# EAGLE board 2D_PCB (EAGLE 9.7.0)
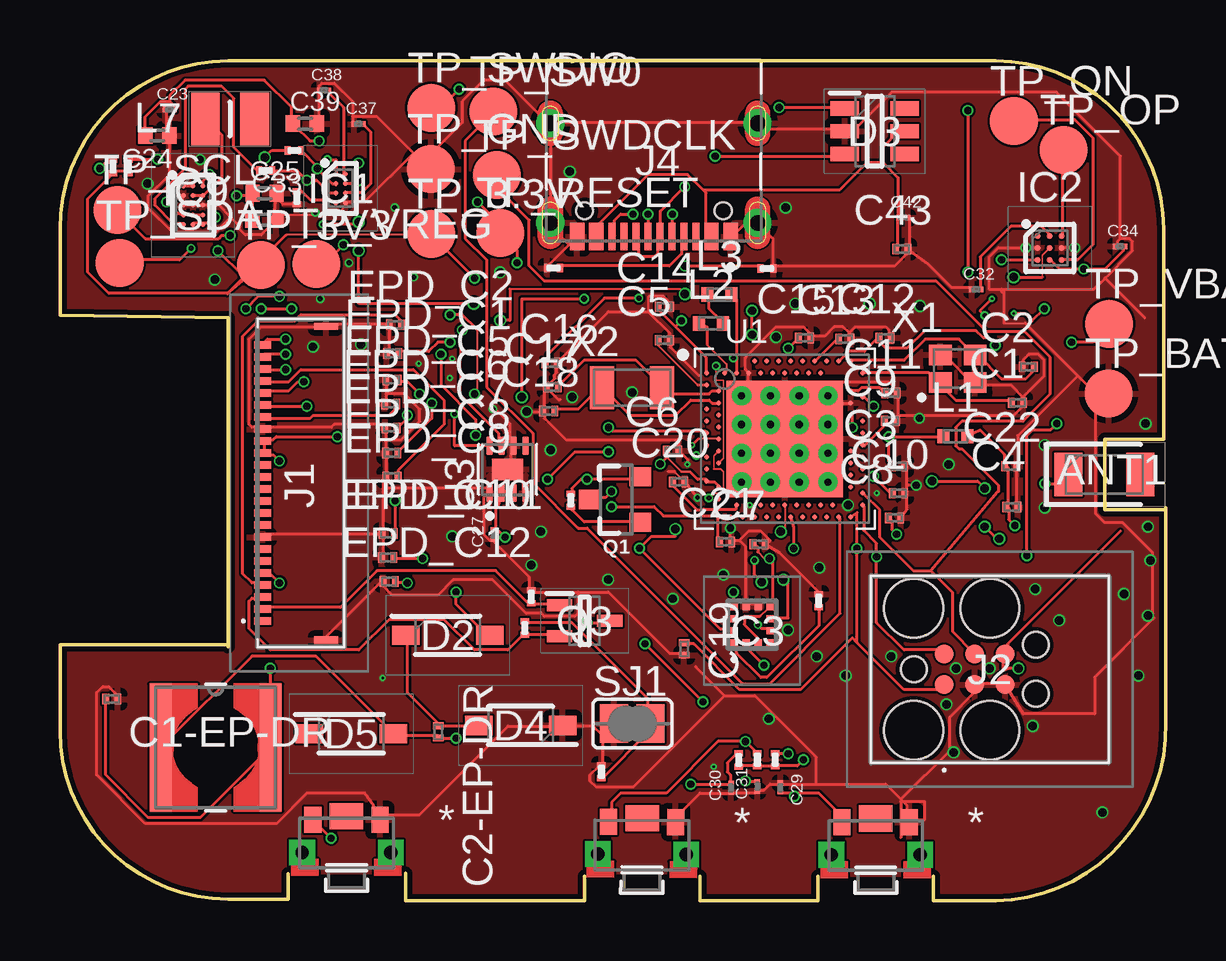
[diagram p0: board, top side]
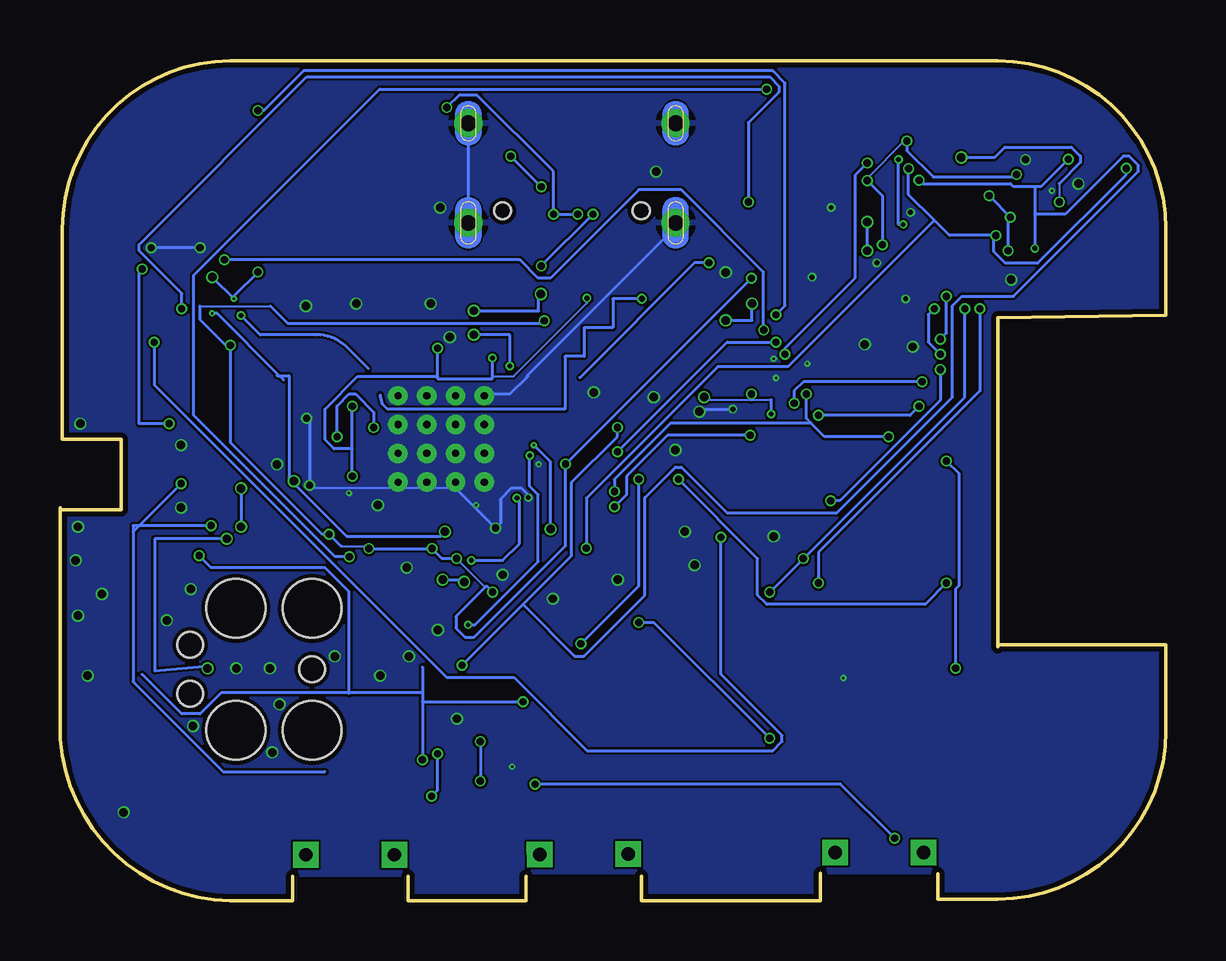
[diagram p1: board, bottom side, seen from below]

Size 46.1 x 35 mm. Coordinates in mm from the lower left corner, seen from the top.
Outline: 7,10.6 7,24.3 0,24.4 0,28 arc-90 7,35 39,35 arc-90 46,28 46,19.24 43.55,19.24 43.55,16.29 46,16.29
Outline: 46.1,16.39 46.1,7.4 arc-90 39,0 36.4,0 36.4,1.04
Outline: 9.5,1.14 9.5,0.08 7,0.08 arc-90 0,7.08 0,10.68 7,10.68
Outline: 14.4,1.15 14.4,0 21.87,0 21.87,1.04
Outline: 26.67,1.04 26.67,0 31.6,0 31.6,1.04
Copper layers (1*16): Top 0.035mm / dielectric 1.6mm / Bottom 0.035mm
Design rules "Fusion Electronics Design Rules *": minimum track width 0.07mm, minimum drill 0.1mm, track to track 0.09mm, track to pad 0.01mm, pad to pad 5mil, via to via 5mil, smd to smd 0.07mm, copper to edge 0.2mm, drill to drill 6mil, minimum pad ring 10mil, minimum via ring 3mil, stop-mask expansion 4mil, vias tented up to drill 0mil, thermal gap 10mil

## Footprints (pad centres in the part's own frame; a part is rotated, then mirrored left to right if it is on the bottom)
2450AT18B100E_ANTC3216X140N = smd 1.15 x 1.8: 1 -1.5,0; 2 1.5,0
NORDIC_NRF_3_RESC0201_L = smd 0.28 x 0.43: 1 -0.255,0; 2 0.255,0
GRM011R60J152KE01L_2_CAPC0201X13N = smd 0.22 x 0.23: 1 -0.185,0; 2 0.185,0
PERFECT_0402_0402 = smd 0.6 x 0.7: 1 -0.5,0; 2 0.5,0
ESP32_C6_LIBRARY_5_SOD3716X135N = smd 1.15 x 0.8: 1 -1.75,0; 2 1.75,0
ESP32_C6_LIBRARY_3_SOT95P280X145-6N = smd 1.2 x 0.6: 1 -1.25,0.95; 2 -1.25,0; 3 -1.25,-0.95; 4 1.25,-0.95; 5 1.25,0; 6 1.25,0.95
BQ25180YBGR_BGA8C40P2X4_100X155X50 = smd 0.2 x 0.2: A1 -0.2,0.6; A2 0.2,0.6; B1 -0.2,0.2; B2 0.2,0.2; C1 -0.2,-0.2; C2 0.2,-0.2; D1 -0.2,-0.6; D2 0.2,-0.6
DRV2605YZFR_BGA9C50P3X3_144X144X62 = smd 0.25 x 0.25: A1 -0.5,0.5; A2 0,0.5; A3 0.5,0.5; B1 -0.5,0; B2 0,0; B3 0.5,0; C1 -0.5,-0.5; C2 0,-0.5; C3 0.5,-0.5
BMA423_BMA423 = smd 0.3 x 0.35: 1 -0.75,-0.775; 2 -0.25,-0.775; 3 0.25,-0.775; 4 0.75,-0.775; 7 0.75,0.775; 8 0.25,0.775; 9 -0.25,0.775; 10 -0.75,0.775 | smd 0.35 x 0.3: 5 0.775,-0.25; 6 0.775,0.25; 11 -0.775,0.25; 12 -0.775,-0.25
RT6160AWSC_BGA15C40P3X5_140X230X60 = smd 0.216 x 0.216: A1 -0.4,0.8; A2 0,0.8; A3 0.4,0.8; B1 -0.4,0.4; B2 0,0.4; B3 0.4,0.4; C1 -0.4,0; C2 0,0; C3 0.4,0; D1 -0.4,-0.4; D2 0,-0.4; D3 0.4,-0.4; E1 -0.4,-0.8; E2 0,-0.8; E3 0.4,-0.8
503480-2400_5034802400 = smd 0.3 x 0.7: 1 -5.75,1.525; 2 -5.25,1.525; 3 -4.75,1.525; 4 -4.25,1.525; 5 -3.75,1.525; 6 -3.25,1.525; 7 -2.75,1.525; 8 -2.25,1.525; 9 -1.75,1.525; 10 -1.25,1.525; 11 -0.75,1.525; 12 -0.25,1.525; 13 0.25,1.525; 14 0.75,1.525; 15 1.25,1.525; 16 1.75,1.525; 17 2.25,1.525; 18 2.75,1.525; 19 3.25,1.525; 20 3.75,1.525; 21 4.25,1.525; 22 4.75,1.525; 23 5.25,1.525; 24 5.75,1.525 | smd 0.3 x 1: MP1 -6.54,-1.125; MP2 6.54,-1.125
TC2030-IDC_TC2030IDC = smd 0.783 x 0.783: 1 -0.953,-0.635; 2 -0.953,0.635; 3 0.317,-0.635; 4 0.317,0.635; 5 1.588,-0.635; 6 1.588,0.635 | hole 2.451: -2.223,-2.54; -2.223,2.54; 0.952,-2.54; 0.952,2.54 | hole 1.067: -2.223,0; 2.857,-1.016; 2.857,1.016
KH-TYPE-C-16P_KINGHELM_KH-TYPE-C-16P = smd 0.6 x 1.15: A1_B12 -3.2,4.725; A4_B9 -2.4,4.725; A9_B4 2.4,4.725; A12_B1 3.2,4.725 | smd 0.3 x 1.15: A5 -1.25,4.725; A6 -0.25,4.725; A7 0.25,4.725; A8 1.25,4.725; B5 1.75,4.725; B6 0.75,4.725; B7 -0.75,4.725; B8 -1.75,4.725 | drill 0.65 pad 1.05: SH1 -4.32,0; SH2 4.32,0; SH3 -4.32,4.15; SH4 4.32,4.15 | hole 0.7: -2.89,3.65; 2.89,3.65
NORDIC_NRF_2_RESC0402_L = smd 0.5 x 0.6: 1 -0.5,0; 2 0.5,0
ESP32_C6_LIBRARY_2_IND_4828-WE-TPC_WRE = smd 0.9 x 5.3: 1 -2.286,0; 2 2.286,0
MLP2016SR47MT0S1_INDC2016X100N = smd 1.2 x 2.2: 1 -1.028,0; 2 1.028,0
ESP32_C6_LIBRARY_4_ESP32_C6_LIBRARY_4_ESP32_C6_LIBRARY_4_ESP32_C6_LIBRARY_4_ESP32_WROVER_SPARKFUN-DISCRETESEMI_SOT23-3 = smd 0.8 x 0.9: 1 -0.95,-1; 2 0.95,-1; 3 0,1.1
ESP32_C6_LIBRARY_6_SOT65P210X110-3N = smd 1.05 x 0.5: 1 -1.05,0.65; 2 -1.05,-0.65; 3 1.05,0
CPF0201D7K68C1_0201 = smd 0.35 x 0.25: 1 0,0.275; 2 0,-0.275
ERA-1AEB3401C_0201 = smd 0.35 x 0.25: 1 0,0.275; 2 0,-0.275
ESP32_C6_LIBRARY_7_JUMPER_SJ = smd 1.168 x 1.6: 1 -0.762,0; 2 0.762,0
2025-10-22_07-23-44_LIBRARY_SW_EVP-AKE31A_PAN = smd 0.711 x 1.092: 1 -1.4,-0.972; 2 1.4,-0.972 | drill 0.559 pad 0.914 square: 3 -1.848,0.381; 4 1.848,0.381 | smd 1.397 x 1.092: 5 0,-1.124
HECTOR_WATCH_1_TP20R = smd 2 x 2: TP 0,0
NORDIC_NRF_4_AQFN50P700X700X85_HS-74N = smd 4.85 x 4.85: P$74 0,0 | drill 0.3 pad 0.6: P$75 -1.8,1.8; P$76 -0.6,1.8; P$77 0.6,1.8; P$78 1.8,1.8; P$79 -1.8,0.6; P$80 -0.6,0.6; P$81 0.6,0.6; P$82 1.8,0.6; P$83 -1.8,-0.6; P$84 -0.6,-0.6; P$85 0.6,-0.6; P$86 1.8,-0.6; P$87 -1.8,-1.8; P$88 -0.6,-1.8; P$89 0.6,-1.8; P$90 1.8,-1.8 | smd 0.2 x 0.2: P$A8 -1.25,3.25; P$A10 -0.75,3.25; P$A12 -0.25,3.25; P$A14 0.25,3.25; P$A16 0.75,3.25; P$A18 1.25,3.25; P$A20 1.75,3.25; P$A22 2.25,3.25; P$A23 2.75,3.25; P$AA24 3.25,-2.25; P$AB2 -2.75,-2.5; P$AC5 -2,-2.75; P$AC9 -1,-2.75; P$AC11 -0.5,-2.75; P$AC13 0,-2.75; P$AC15 0.5,-2.75; P$AC17 1,-2.75; P$AC19 1.5,-2.75; P$AC21 2,-2.75; P$AC24 3.25,-2.75; P$AD2 -2.75,-3.25; P$AD4 -2.25,-3.25; P$AD6 -1.75,-3.25; P$AD8 -1.25,-3.25; P$AD10 -0.75,-3.25; P$AD12 -0.25,-3.25; P$AD14 0.25,-3.25; P$AD16 0.75,-3.25; P$AD18 1.25,-3.25; P$AD20 1.75,-3.25; P$AD22 2.25,-3.25; P$AD23 2.75,-3.25; P$B1 -3.25,2.75; P$B3 -2.5,2.75; P$B5 -2,2.75; P$B7 -1.5,2.75; P$B9 -1,2.75; P$B11 -0.5,2.75; P$B13 0,2.75; P$B15 0.5,2.75; P$B17 1,2.75; P$B19 1.5,2.75; P$B24 3.25,2.75; P$C1 -3.25,2.25; P$D2 -2.75,2; P$D23 2.75,2; P$E24 3.25,1.75; P$F2 -2.75,1.5; P$F23 2.75,1.5; P$G1 -3.25,1.25; P$H2 -2.75,1; P$H23 2.75,1; P$J1 -3.25,0.75; P$J24 3.25,0.75; P$K2 -2.75,0.5; P$L1 -3.25,0.25; P$L24 3.25,0.25; P$M2 -2.75,0; P$N1 -3.25,-0.25; P$N24 3.25,-0.25; P$P2 -2.75,-0.5; P$P23 2.75,-0.5; P$R1 -3.25,-0.75; P$R24 3.25,-0.75; P$T2 -2.75,-1; P$T23 2.75,-1; P$U1 -3.25,-1.25; P$U24 3.25,-1.25; P$V23 2.75,-1.5; P$W1 -3.25,-1.75; P$W24 3.25,-1.75; P$Y2 -2.75,-2; P$Y23 2.75,-2
ESP32_C6_LIBRARY_SON50P200X200X80-9N = smd 0.76 x 0.27: 1 -0.985,0.75; 2 -0.985,0.25; 3 -0.985,-0.25; 4 -0.985,-0.75; 5 0.985,-0.75; 6 0.985,-0.25; 7 0.985,0.25; 8 0.985,0.75 | smd 0.9 x 1.3: 9 0,0
NORDIC_NRF_BT-XTAL_2016_N = smd 0.95 x 0.85: 1 -0.725,-0.575; 2 0.725,-0.575; 3 0.725,0.575; 4 -0.725,0.575
NORDIC_NRF_1_XTAL_3215_N = smd 1 x 1.8: 1 -1.25,0; 2 1.25,0

## Placement (x,y rotation side)
ANT1  2450AT18B100E  [2450AT18B100E_ANTC3216X140N]  43.53,17.77 0 top
C1  12pF  [NORDIC_NRF_3_RESC0201_L]  39.91,20.76 0 top
C1-EP-DR  10uF  [NORDIC_NRF_3_RESC0201_L]  2.16,8.41 0 top
C2  12pF  [NORDIC_NRF_3_RESC0201_L]  40.36,22.26 0 top
C2-EP-DR  4.7uF/25V  [NORDIC_NRF_3_RESC0201_L]  15.77,7.04 270 top
C3  1pF  [NORDIC_NRF_3_RESC0201_L]  34.95,18.11 0 top
C4  1pF  [NORDIC_NRF_3_RESC0201_L]  39.67,16.41 0 top
C5  100nF  [NORDIC_NRF_3_RESC0201_L]  25.19,23.36 0 top
C6  4.7µF  [NORDIC_NRF_3_RESC0201_L]  25.54,18.76 0 top
C7  100nF  [NORDIC_NRF_3_RESC0201_L]  29.14,14.86 0 top
C8  100nF  [NORDIC_NRF_3_RESC0201_L]  34.79,15.96 0 top
C9  820pF N.C.  [NORDIC_NRF_3_RESC0201_L]  34.62,20.01 0 top
C10  N.C.  [NORDIC_NRF_3_RESC0201_L]  34.95,16.99 0 top
C11  100pF  [NORDIC_NRF_3_RESC0201_L]  34.64,21.16 0 top
C12  100nF  [NORDIC_NRF_3_RESC0201_L]  34.39,23.46 0 top
C13  N.C.  [NORDIC_NRF_3_RESC0201_L]  32.71,23.41 0 top
C14  4.7µF  [NORDIC_NRF_3_RESC0201_L]  25.19,24.76 0 top
C15  1.0µF  [NORDIC_NRF_3_RESC0201_L]  31.04,23.46 0 top
C16  47nF  [NORDIC_NRF_3_RESC0201_L]  20.47,22.41 0 top
C17  12pF  [NORDIC_NRF_3_RESC0201_L]  20.52,21.41 0 top
C18  12pF  [NORDIC_NRF_3_RESC0201_L]  20.37,20.41 0 top
C19  100nF  [NORDIC_NRF_3_RESC0201_L]  26.02,10.5 270 top
C20  4.7µF  [NORDIC_NRF_3_RESC0201_L]  25.79,17.46 0 top
C21  4.7µF  [NORDIC_NRF_3_RESC0201_L]  27.74,14.96 0 top
C22  N.C.  [NORDIC_NRF_3_RESC0201_L]  39.63,18.11 0 top
C23  0.1uF  [GRM011R60J152KE01L_2_CAPC0201X13N]  4.57,32.97 0 top
C24  10uF  [PERFECT_0402_0402]  4.06,31.89 180 top
C25  22uF  [PERFECT_0402_0402]  8.53,29.49 0 top
C27  0.1uF  [GRM011R60J152KE01L_2_CAPC0201X13N]  18.07,15.27 90 top
C29  1uF  [GRM011R60J152KE01L_2_CAPC0201X13N]  30.03,4.73 270 top
C30  1uF  [GRM011R60J152KE01L_2_CAPC0201X13N]  27.97,4.71 90 top
C31  1uF  [GRM011R60J152KE01L_2_CAPC0201X13N]  29.07,4.77 90 top
C32  1uF  [GRM011R60J152KE01L_2_CAPC0201X13N]  38.19,25.47 0 top
C33  22uF  [PERFECT_0402_0402]  8.52,28.39 0 top
C34  0.1uF  [GRM011R60J152KE01L_2_CAPC0201X13N]  44.19,27.27 0 top
C37  1uF  [GRM011R60J152KE01L_2_CAPC0201X13N]  12.45,32.37 0 top
C38  1uF  [GRM011R60J152KE01L_2_CAPC0201X13N]  11.01,33.77 0 top
C39  10uF  [PERFECT_0402_0402]  10.21,32.39 0 top
C42  0.1uF  [GRM011R60J152KE01L_2_CAPC0201X13N]  35.15,28.47 0 top
C43  4.7uF  [NORDIC_NRF_3_RESC0201_L]  35.09,27.16 0 top
D2  MBR0530  [ESP32_C6_LIBRARY_5_SOD3716X135N]  16.16,11.07 0 top
D3  USBLC6-2SC6Y  [ESP32_C6_LIBRARY_3_SOT95P280X145-6N]  33.96,32.07 0 top
D4  MBR0530  [ESP32_C6_LIBRARY_5_SOD3716X135N]  19.2,7.31 180 top
D5  MBR0530  [ESP32_C6_LIBRARY_5_SOD3716X135N]  12.14,6.97 0 top
EPD_C1  1uF/50V  [NORDIC_NRF_3_RESC0201_L]  13.87,22.81 0 top
EPD_C2  1uF/50V  [NORDIC_NRF_3_RESC0201_L]  13.98,24.01 0 top
EPD_C5  0.1uF/50V  [NORDIC_NRF_3_RESC0201_L]  13.84,21.71 0 top
EPD_C6  1uF/50V  [NORDIC_NRF_3_RESC0201_L]  13.79,20.71 0 top
EPD_C7  1uF/50V  [NORDIC_NRF_3_RESC0201_L]  13.8,19.71 0 top
EPD_C8  1uF/50V  [NORDIC_NRF_3_RESC0201_L]  13.83,18.66 0 top
EPD_C9  1uF/50V  [NORDIC_NRF_3_RESC0201_L]  13.84,17.66 0 top
EPD_C10  1uF/50V  [NORDIC_NRF_3_RESC0201_L]  13.68,15.31 0 top
EPD_C11  1uF/50V  [NORDIC_NRF_3_RESC0201_L]  13.66,14.31 0 top
EPD_C12  1uF/50V  [NORDIC_NRF_3_RESC0201_L]  13.72,13.31 0 top
IC1  BQ25180YBGR  [BQ25180YBGR_BGA8C40P2X4_100X155X50]  11.7,29.69 0 top
IC2  DRV2605YZFR  [DRV2605YZFR_BGA9C50P3X3_144X144X62]  41.26,27.21 0 top
IC3  BMA421  [BMA423_BMA423]  28.85,11.51 0 top
IC9  RT6160AWSC  [RT6160AWSC_BGA15C40P3X5_140X230X60]  5.55,28.99 0 top
J1  503480-2400  [503480-2400_5034802400]  9.97,17.41 90 top
J2  TC2030-IDC  [TC2030-IDC_TC2030IDC]  37.81,9.65 0 top
J4  KH-TYPE-C-16P  [KH-TYPE-C-16P_KINGHELM_KH-TYPE-C-16P]  24.76,32.4 180 top
L1  3.9nH  [NORDIC_NRF_2_RESC0402_L]  37.32,19.36 0 top
L2  10µH  [NORDIC_NRF_2_RESC0402_L]  27.14,24.06 0 top
L3  15nH  [NORDIC_NRF_2_RESC0402_L]  27.49,25.26 0 top
L5  68uH  [ESP32_C6_LIBRARY_2_IND_4828-WE-TPC_WRE]  6.49,6.39 0 top
L7  FTC252012SR47MBCA  [MLP2016SR47MT0S1_INDC2016X100N]  7.09,32.58 0 top
Q1  20V/4.2A/52mΩ/1.4W  [ESP32_C6_LIBRARY_4_ESP32_C6_LIBRARY_4_ESP32_C6_LIBRARY_4_ESP32_C6_LIBRARY_4_ESP32_WROVER_SPARKFUN-DISCRETESEMI_SOT23-3]  23.19,16.73 90 top
Q3  SI1308EDL-T1-GE3  [ESP32_C6_LIBRARY_6_SOT65P210X110-3N]  21.87,11.67 0 top
R1_EP_DR  0.47  [CPF0201D7K68C1_0201]  19.37,11.37 0 top
R1_USB  5K1  [ERA-1AEB3401C_0201]  20.57,26.37 90 top
R2  0  [CPF0201D7K68C1_0201]  8.57,30.43 90 top
R2_EP_DR  10K  [CPF0201D7K68C1_0201]  19.65,12.67 0 top
R2_USB  5K1  [ERA-1AEB3401C_0201]  29.47,26.35 90 top
R3  0  [CPF0201D7K68C1_0201]  31.63,12.51 180 top
R4  0  [CPF0201D7K68C1_0201]  9.77,31.27 90 top
R5  10K  [ERA-1AEB3401C_0201]  28.29,5.87 0 top
R7  10K  [ERA-1AEB3401C_0201]  29.81,5.88 0 top
R8  10K  [ERA-1AEB3401C_0201]  29.07,5.88 0 top
R9  10K  [CPF0201D7K68C1_0201]  9.87,29.3 180 top
R17  3K3  [CPF0201D7K68C1_0201]  2.21,30.6 180 top
R18  3K3  [CPF0201D7K68C1_0201]  2.85,30.6 180 top
R_PWR_EPD  10K  [CPF0201D7K68C1_0201]  21.29,16.7 180 top
R_TYPE_SEL  2.2  [CPF0201D7K68C1_0201]  22.57,5.38 0 top
SJ1  [ESP32_C6_LIBRARY_7_JUMPER_SJ]  23.86,7.39 0 top
SW_DN  2025-10-22_07-23-44_LIBRARY_EVP-AKE31ASW_EVP-AKE31A_PAN  [2025-10-22_07-23-44_LIBRARY_SW_EVP-AKE31A_PAN]  34,2.31 180 top
SW_ENT  2025-10-22_07-23-44_LIBRARY_EVP-AKE31ASW_EVP-AKE31A_PAN  [2025-10-22_07-23-44_LIBRARY_SW_EVP-AKE31A_PAN]  24.26,2.32 179.7 top
SW_UP  2025-10-22_07-23-44_LIBRARY_EVP-AKE31ASW_EVP-AKE31A_PAN  [2025-10-22_07-23-44_LIBRARY_SW_EVP-AKE31A_PAN]  11.94,2.41 180 top
TP_3.3V  HECTOR_WATCH_1_TPTP20R  [HECTOR_WATCH_1_TP20R]  15.48,27.79 0 top
TP_3V3  HECTOR_WATCH_1_TPTP20R  [HECTOR_WATCH_1_TP20R]  8.38,26.49 0 top
TP_BAT_GND  HECTOR_WATCH_1_TPTP20R  [HECTOR_WATCH_1_TP20R]  43.71,21.14 0 top
TP_GND  HECTOR_WATCH_1_TPTP20R  [HECTOR_WATCH_1_TP20R]  15.46,30.49 0 top
TP_ON  HECTOR_WATCH_1_TPTP20R  [HECTOR_WATCH_1_TP20R]  39.76,32.49 0 top
TP_OP  HECTOR_WATCH_1_TPTP20R  [HECTOR_WATCH_1_TP20R]  41.84,31.29 0 top
TP_RESET  HECTOR_WATCH_1_TPTP20R  [HECTOR_WATCH_1_TP20R]  18.35,27.84 0 top
TP_SCL  HECTOR_WATCH_1_TPTP20R  [HECTOR_WATCH_1_TP20R]  2.4,28.79 0 top
TP_SDA  HECTOR_WATCH_1_TPTP20R  [HECTOR_WATCH_1_TP20R]  2.49,26.59 0 top
TP_SW0  HECTOR_WATCH_1_TPTP20R  [HECTOR_WATCH_1_TP20R]  18.07,32.89 0 top
TP_SWDCLK  HECTOR_WATCH_1_TPTP20R  [HECTOR_WATCH_1_TP20R]  18.21,30.24 0 top
TP_SWDIO  HECTOR_WATCH_1_TPTP20R  [HECTOR_WATCH_1_TP20R]  15.48,33.04 0 top
TP_VBAT  HECTOR_WATCH_1_TPTP20R  [HECTOR_WATCH_1_TP20R]  43.73,24.04 0 top
TP_VREG  HECTOR_WATCH_1_TPTP20R  [HECTOR_WATCH_1_TP20R]  10.69,26.54 0 top
U1  NRF52840 _QF  [NORDIC_NRF_4_AQFN50P700X700X85_HS-74N]  30.21,19.25 0 top
U3  MAX17048G+T10  [ESP32_C6_LIBRARY_SON50P200X200X80-9N]  18.66,17.98 90 top
X1  32MHz  [NORDIC_NRF_BT-XTAL_2016_N]  37.42,22.18 0 top
X2  32.768kHz  [NORDIC_NRF_1_XTAL_3215_N]  23.85,21.38 0 top

## Library data of the parts
ANT1 = InkTime_v5; ARROW_PART_NUMBER: 2450AT18B100E; ARROW_PRICE-STOCK: https://www.arrow.com/en/products/2450at18b100e/johanson-dielectrics?utm_currency=USD&region=nac; DESCRIPTION: Antennas 2.45GHz ANTENNA; HEIGHT: 1.4mm; MANUFACTURER_NAME: JOHANSON TECHNOLOGY; MANUFACTURER_PART_NUMBER: 2450AT18B100E; MOUSER_PART_NUMBER: 609-2450AT18B100E; MOUSER_PRICE-STOCK: https://www.mouser.co.uk/ProductDetail/Johanson-Technology/2450AT18B100E?qs=yCnrNFeXz%252Bh5MFsFIXGZGA%3D%3D
C1 C1-EP-DR C2 C2-EP-DR C3-C22 C24 C25 C33 C39 C43 EPD_C1 EPD_C2 EPD_C5-EPD_C12 L1-L3 R1_EP_DR R1_USB R2 R2_EP_DR R2_USB R3-R5 R7-R9 R17 R18 R_PWR_EPD R_TYPE_SEL SJ1 TP_3.3V TP_3V3 TP_BAT_GND TP_GND TP_ON TP_OP TP_RESET TP_SCL TP_SDA TP_SW0 TP_SWDCLK TP_SWDIO TP_VBAT TP_VREG X1 X2 = InkTime_v5
C23 C27 C29-C32 C34 C37 C38 C42 = InkTime_v5; AVAILABILITY: In Stock; CHECK_PRICES: https://www.snapeda.com/parts/GRM011R60J152KE01L/Murata/view-part/?ref=eda; DESCRIPTION: SMD Capacitor X5R(EIA) with Capacitance: 1500pF Tol. 10%. Rated Voltage: 6.3Vdc; MF: Murata; MP: GRM011R60J152KE01L; PACKAGE: 0201 Murata; PRICE: None; SNAPEDA_LINK: https://www.snapeda.com/parts/GRM011R60J152KE01L/Murata/view-part/?ref=snap
D2 D4 D5 = InkTime_v5; AVAILABILITY: In Stock; CHECK_PRICES: https://www.snapeda.com/parts/MBR0530/Onsemi/view-part/?ref=eda; DESCRIPTION: Diode Schottky 30 V 500mA Surface Mount SOD-123; MF: ON Semiconductor; MP: MBR0530; PACKAGE: SOD-123-2 ON Semiconductor; PRICE: None; PURCHASE-URL: https://www.snapeda.com/api/url_track_click_mouser/?unipart_id=179458&manufacturer=ON Semiconductor&part_name=MBR0530&search_term=None; SNAPEDA_LINK: https://www.snapeda.com/parts/MBR0530/Onsemi/view-part/?ref=snap
D3 = InkTime_v5; AVAILABILITY: In Stock; CHECK_PRICES: https://www.snapeda.com/parts/USBLC6-2SC6Y/STMicroelectronics/view-part/?ref=eda; DESCRIPTION: 17V Clamp 5A (8/20µs) Ipp Tvs Diode Surface Mount SOT-23-6; MF: STMicroelectronics; MP: USBLC6-2SC6Y; PACKAGE: SOT-23-6 STMicroelectronics; PRICE: None; SNAPEDA_LINK: https://www.snapeda.com/parts/USBLC6-2SC6Y/STMicroelectronics/view-part/?ref=snap
IC1 = InkTime_v5; ARROW_PART_NUMBER: BQ25180YBGR; ARROW_PRICE-STOCK: https://www.arrow.com/en/products/bq25180ybgr/texas-instruments?utm_currency=USD&region=nac; DESCRIPTION: Charger IC Lithium Ion/Polymer, Lithium Iron Phosphate 8-DSBGA (1.6x1.1); HEIGHT: 0.5mm; MANUFACTURER_NAME: Texas Instruments; MANUFACTURER_PART_NUMBER: BQ25180YBGR; MOUSER_PART_NUMBER: 595-BQ25180YBGR; MOUSER_PRICE-STOCK: https://www.mouser.co.uk/ProductDetail/Texas-Instruments/BQ25180YBGR?qs=doiCPypUmgEWjAK%252BJAX6Tw%3D%3D
IC2 = InkTime_v5; ARROW_PART_NUMBER: DRV2605YZFR; ARROW_PRICE-STOCK: https://www.arrow.com/en/products/drv2605yzfr/texas-instruments?region=nac; DESCRIPTION: Haptic Driver for ERM/LRA with Built-In Library and Smart Loop Architecture; HEIGHT: 0.625mm; MANUFACTURER_NAME: Texas Instruments; MANUFACTURER_PART_NUMBER: DRV2605YZFR
IC3 = InkTime_v5; ARROW_PART_NUMBER: BMA423; ARROW_PRICE-STOCK: https://www.arrow.com/en/products/bma423/bosch; DESCRIPTION: Accelerometers Triaxial low-g 12bit Acceleration Sensor; HEIGHT: 1mm; MANUFACTURER_NAME: BOSCH; MANUFACTURER_PART_NUMBER: BMA423; MOUSER_PART_NUMBER: 262-BMA423; MOUSER_PRICE-STOCK: https://www.mouser.co.uk/ProductDetail/Bosch-Sensortec/BMA423?qs=HXFqYaX1Q2xC%252BSgeGoX3mg%3D%3D
IC9 = InkTime_v5; DESCRIPTION: Buck-Boost Regulator Positive Output Step-Up/Step-Down I2C DC-DC Controller IC 15-WL-CSP (BSC) (1.4x2.3); HEIGHT: 0.6mm; MANUFACTURER_NAME: RICHTEK; MANUFACTURER_PART_NUMBER: RT6160AWSC; MOUSER_PART_NUMBER: 835-RT6160AWSC; MOUSER_PRICE-STOCK: https://www.mouser.co.uk/ProductDetail/Richtek/RT6160AWSC?qs=amGC7iS6iy%2FLd9PSoixZXQ%3D%3D
J1 = InkTime_v5; DESCRIPTION: FFC & FPC Connectors 0.5mm FPC RA SMT Dual Contact 24Ckt; HEIGHT: 1.87mm; MANUFACTURER_NAME: Molex; MANUFACTURER_PART_NUMBER: 503480-2400; MOUSER_PART_NUMBER: 538-503480-2400; MOUSER_PRICE-STOCK: https://www.mouser.co.uk/ProductDetail/Molex/503480-2400?qs=OAhjpuo3Vu7efIoxFh9AOw%3D%3D
J2 = InkTime_v5; DESCRIPTION: CABLE ADAPTER 6 POS; HEIGHT: 19mm; MANUFACTURER_NAME: Tag Connect; MANUFACTURER_PART_NUMBER: TC2030-IDC
J4 = InkTime_v5; AVAILABILITY: Not in stock; CHECK_PRICES: https://www.snapeda.com/parts/KH-TYPE-C-16P/Kinghelm/view-part/?ref=eda; MF: kinghelm; MP: KH-TYPE-C-16P; PACKAGE: None; PRICE: None; SNAPEDA_LINK: https://www.snapeda.com/parts/KH-TYPE-C-16P/Kinghelm/view-part/?ref=snap
L5 = InkTime_v5; COPYRIGHT: Copyright (C) 2024 Ultra Librarian. All rights reserved.; MANUFACTURER_PART_NUMBER: 744043680; MFR_NAME: Wurth Electronics
L7 = InkTime_v5; DESCRIPTION: SMD / SMT Inductors (Coils), L=0.47?H, L x W x T :; HEIGHT: 1mm; JLCPCB: https://jlcpcb.com/partdetail/6763488-FTC252012SR47MBCA/C5832368; MANUFACTURER_NAME: TDK; MANUFACTURER_PART_NUMBER: FTC252012SR47MBCA
Q1 = InkTime_v5; PROD_ID: TRAN-14388
Q3 = InkTime_v5; AVAILABILITY: In Stock; CHECK_PRICES: https://www.snapeda.com/parts/SI1308EDL-T1-GE3/Vishay+Siliconix/view-part/?ref=eda; DESCRIPTION: Si1308EDL-T1-GE3 N-channel MOSFET Transistor, 1.5 A, 30 V, 3-Pin SC-70 | Siliconix / Vishay SI1308EDL-T1-GE3; MF: Vishay Siliconix; MP: SI1308EDL-T1-GE3; PACKAGE: SOT-323 Vishay Semiconductor; PRICE: None; PURCHASE-URL: https://www.snapeda.com/api/url_track_click_mouser/?unipart_id=274603&manufacturer=Vishay Siliconix&part_name=SI1308EDL-T1-GE3&search_term=None; SNAPEDA_LINK: https://www.snapeda.com/parts/SI1308EDL-T1-GE3/Vishay+Siliconix/view-part/?ref=snap
SW_DN SW_ENT SW_UP = InkTime_v5; COPYRIGHT: Copyright (C) 2025 Ultra Librarian. All rights reserved.; DIGI-KEY_PART_NUMBER_1: P123437TR-ND; DIGI-KEY_PART_NUMBER_2: P123437CT-ND; DIGI-KEY_PART_NUMBER_3: P123437DKR-ND; MANUFACTURER_NAME: Panasonic; MANUFACTURER_PART_NUMBER: EVP-AKE31A
U1 = InkTime_v5; U1: NRF52840 _QF
U3 = InkTime_v5; AVAILABILITY: In Stock; CHECK_PRICES: https://www.snapeda.com/parts/MAX17048G+T10/Analog+Devices/view-part/?ref=eda; DESCRIPTION: 3µA 1-Cell/2-Cell Fuel Gauge with ModelGauge; MF: Analog Devices; MP: MAX17048G+T10; PACKAGE: TDFN-8 Maxim; PRICE: None; PURCHASE-URL: https://www.snapeda.com/api/url_track_click_mouser/?unipart_id=329239&manufacturer=Analog Devices&part_name=MAX17048G+T10&search_term=None; SNAPEDA_LINK: https://www.snapeda.com/parts/MAX17048G+T10/Analog+Devices/view-part/?ref=snap

## Nets
3V3/1.7D: C34.2 IC2.C2 Q1.2 R5.2 R7.2 R8.2 R_PWR_EPD.2
3V3/2.4A: C6.1 C7.1 C8.1 C12.1 C14.1 C19.1 C25.1 C33.1 IC3.3 IC3.7 IC3.10 IC9.E2 IC9.E3 J2.1 R17.1 R18.1 TP_3.3V.TP TP_3V3.TP U1.P$A22 U1.P$AD14 U1.P$AD23 U1.P$B1 U1.P$W1 U1.P$Y2
ALERT/1.6C: U3.5
ALERT/2.5C: U1.P$J24
D+/1.5D: D3.4
D+/2.7D: U1.P$AD6
D-/1.5D: D3.6
D-/2.7D: U1.P$AD4
DN: D3.1 J4.A7 J4.B7
DP: D3.3 J4.A6 J4.B6
EPD_3V3: C1-EP-DR.1 EPD_C5.2 J1.15 J1.16 L5.2 Q1.3
EPD_BUSY/1.5D: J1.9
EPD_BUSY/2.2D: U1.P$AD12
EPD_CS/1.4C: J1.12
EPD_CS/2.2D: U1.P$K2
EPD_DC/1.5D: J1.11
EPD_DC/2.2D: U1.P$AD10
EPD_RST/1.5D: J1.10
EPD_RST/2.2D: U1.P$AC11
GDR: J1.2 Q3.1 R2_EP_DR.2
GND: C1-EP-DR.2 C1.2 C2.1 C3.2 C4.2 C5.2 C6.2 C7.2 C8.2 C9.2 C10.2 C11.2 C12.2 C13.2 C14.2 C15.2 C16.2 C17.1 C18.1 C19.2 C20.2 C21.2 C22.2 C23.1 C24.1 C25.2 C27.1 C29.1 C30.1 C31.1 C32.1 C33.2 C34.1 C37.1 C38.1 C39.2 C42.2 C43.2 D3.2 D4.1 EPD_C1.1 EPD_C2.1 EPD_C5.1 EPD_C6.1 EPD_C7.1 EPD_C8.1 EPD_C9.1 EPD_C10.1 EPD_C11.1 EPD_C12.1 IC1.D2 IC2.B1 IC2.B3 IC3.8 IC3.9 IC9.B1 IC9.C1 IC9.C2 IC9.C3 J1.8 J1.17 J1.MP1 J1.MP2 J2.3 J2.5 J4.A1_B12 J4.A12_B1 J4.SH1 J4.SH2 J4.SH3 J4.SH4 R1_USB.1 R2_EP_DR.1 R2_USB.2 R3.2 R9.1 R_TYPE_SEL.1 SJ1.1 SW_DN.1 SW_ENT.1 SW_UP.1 TP_BAT_GND.TP TP_GND.TP U1.P$74 U1.P$75 U1.P$76 U1.P$77 U1.P$78 U1.P$79 U1.P$80 U1.P$81 U1.P$82 U1.P$83 U1.P$84 U1.P$85 U1.P$86 U1.P$87 U1.P$88 U1.P$89 U1.P$90 U1.P$B7 U1.P$F23 U3.1 U3.4 U3.6 U3.9 X1.2 X1.4
HAPTIC_EN/1.4C: IC2.A1
HAPTIC_EN/2.6A: U1.P$U1
IMU_INT1: IC3.5 U1.P$N1
IMU_INT2: IC3.6 U1.P$P2
LX1: IC9.B2 IC9.B3 L7.1
LX2: L7.2
MOSI/1.5B: J1.14
MOSI/2.2D: U1.P$B13
N$1: IC1.D1 R9.2
N$2: L2.1 U1.P$B3
N$3: IC3.1 R3.1
N$4: L2.2 L3.1
N$5: C10.1 C15.1 C16.1 L3.2 U1.P$B5 U1.P$E24
N$6: C13.1 U1.P$A18
N$7: C5.1 U1.P$C1
N$8: IC9.E1 R2.1
N$9: C17.2 U1.P$D2 X2.2
N$10: IC9.D2 IC9.D3
N$11: IC9.D1 R4.1
N$12: C18.2 U1.P$F2 X2.1
N$13: C20.1 U1.P$AC5
N$14: C9.1 U1.P$N24
N$15: C3.1 L1.1 U1.P$H23
N$16: ANT1.1 C4.1 C22.1 L1.2
N$17: C11.1 U1.P$D23
N$18: C1.1 U1.P$B24 X1.1
N$19: C2.2 U1.P$A23 X1.3
N$20: C2-EP-DR.1 D2.1 D4.2
N$21: C2-EP-DR.2 D5.2 L5.1 Q3.3
N$22: D5.1
N$24: R1_EP_DR.1 R_TYPE_SEL.2 SJ1.2
N$25: C32.2 IC2.A2
N$26: J4.A5 R1_USB.2
N$27: J4.B5 R2_USB.1
N$28: EPD_C2.2 J1.4
N$29: EPD_C1.2 J1.5
N$30: EPD_C6.2 J1.18
N$31: EPD_C7.2 J1.19
N$32: EPD_C8.2 J1.20
N$33: EPD_C10.2 J1.22
N$34: EPD_C12.2 J1.24
OUT+: IC2.A3 TP_OP.TP
OUT-: IC2.C3 TP_ON.TP
P0.04: U1.P$J1
P0.09: U1.P$L24
P0.13/1.5D: C30.2 R5.1 SW_UP.2
P0.13/2.6C: U1.P$AD8
P0.14/1.5D: C31.2 R8.1 SW_ENT.2
P0.14/2.7C: U1.P$AC9
P0.19: U1.P$AC15
P0.20: U1.P$AD16
P0.21: U1.P$AC17
P0.22: U1.P$AD18
P0.23: U1.P$AC19
P0.24: U1.P$AD20
P0.25: U1.P$AC21
P0.26: U1.P$G1
P0.27: U1.P$H2
P0.28: U1.P$B11
P0.29: U1.P$A10
P0.30: U1.P$B9
P0.31: U1.P$A8
P1.01/1.6C: Q1.1 R_PWR_EPD.1
P1.01/2.4B: U1.P$Y23
P1.02/1.6C: C29.2 R7.1 SW_DN.2
P1.02/2.8C: U1.P$W24
P1.03: U1.P$V23
P1.04: U1.P$U24
P1.05: U1.P$T23
P1.06: U1.P$R24
P1.07: U1.P$P23
P1.09: U1.P$R1
P1.10: U1.P$A20
P1.11: U1.P$B19
P1.12: U1.P$B17
P1.13: U1.P$A16
P1.14: U1.P$B15
P1.15: U1.P$A14
PMIC_INT: IC1.A1 U1.P$T2
PREVGH: EPD_C9.2 J1.21
PREVGL: D2.2 EPD_C11.2 J1.23
RESE: J1.3 Q3.2 R1_EP_DR.2
RESET: J2.6 TP_RESET.TP U1.P$AC13
SCK/1.5B: J1.13
SCK/2.2D: U1.P$A12
SCL/1.4C: IC2.C1 U3.7
SCL/2.4C: IC1.B1 IC3.12 R4.2 R17.2 TP_SCL.TP U1.P$M2
SDA/1.4C: IC2.B2 U3.8
SDA/2.4C: IC1.C1 IC3.2 R2.2 R18.2 TP_SDA.TP U1.P$L1
SWDCLK: J2.4 TP_SWDCLK.TP U1.P$AA24
SWDIO: J2.2 TP_SWDIO.TP U1.P$AC24
SWO: TP_SW0.TP U1.P$AD22
VBAT/1.2A: C27.2 TP_VBAT.TP U3.2 U3.3
VBAT/2.5C: C37.2 IC1.C2
VBUS/1.5D: C42.1 C43.1 D3.5 J4.A4_B9 J4.A9_B4
VBUS/2.6D: C21.1 C38.2 IC1.A2 U1.P$AD2
VREG: C23.2 C24.2 C39.1 IC1.B2 IC9.A1 IC9.A2 IC9.A3 TP_VREG.TP

## Tracks (layer width: path | path; a pad name or v marks a point on that pad's centre or on a via)
3V3/1.7D  (via drill 0.3)
  Top 0.127: R_PWR_EPD.2 21.34,17.06 21.34,17.19 21.72,17.57 v21.97,17.57 24.13,17.57 Q1.2 | R5.2 28.33,5.63 28.96,5.63 R8.2 29.09,5.63 29.72,5.63 R7.2 29.85,5.63 30.74,5.63 v30.99,5.88 | C34.2 44.33,27.22 44.33,27.09 43.56,26.33 v42.68,26.33 41.66,26.33 41.28,26.71 IC2.C2 | v26.8,8.3 v24.39,10.71 | v41.55,19.89 41.3,19.64 40.55,19.64 40.3,19.39 v40.3,14.39
  Bottom 0.127: 30.99,9.75 30.99,8.68 | 30.99,8.68 30.99,8.3 | 30.99,8.3 v30.99,5.88 | v21.97,17.57 21.97,13.12 v24.39,10.71 | 30.99,8.3 v26.8,8.3 | 42.68,9.44 41.02,7.79 40.26,7.79 39.37,8.68 34.05,8.68 | 30.99,8.68 34.05,8.68 | v41.55,19.89 42.8,19.89 42.8,26.14 v42.68,26.33 | v40.3,14.39 39.8,13.89 35.05,13.89 34.05,12.89 34.05,8.68 | 34.05,8.64 34.05,8.68
3V3/2.4A  (via drill 0.3)
  Top 0.07: 29.19,11.86 29.5,12.18
  Top 0.09: 15.44,27.76 9.43,27.76 | 25.91,17.88 25.3,18.48 | v29.57,14.27 29.37,14.27 29.09,14.55
  Top 0.1: 26.27,17.88 25.91,17.88
  Top 0.127: 5.95,28.24 5.56,28.24 IC9.E2 | 5.95,28.24 6.23,28.24 v6.48,28.49 | v7.37,29.38 7.88,29.38 8,29.51 8,29.41 | 5.95,28.24 IC9.E3 | 8,29.41 8,28.39 C33.1 | 8,29.41 C25.1 | R18.1 2.8,30.4 2.29,30.4 R17.1 2.16,30.27 1.15,29.25 1.15,26.2 2.04,25.31 6.99,25.31 7.67,26 | 7.67,26 8.16,26.48 TP_3V3.TP | 7.67,26 v6.58,27.09 | 6.97,25.3 TP_3V3.TP | 15.44,27.76 TP_3.3V.TP 15.5,27.73 v17.28,25.95 | 9.43,27.76 8.39,26.72 TP_3V3.TP | 33.22,10.76 v33.22,14.68 33.22,16.18 U1.P$AD23 | 33.22,10.76 35.18,8.8 36.71,8.8 36.83,8.93 J2.1 | 33.22,10.76 33.02,10.96 30.86,8.8 28.33,8.8 26.42,10.71 26.04,10.71 C19.1 | 25.66,23.92 24.9,24.68 C14.1 | 25.66,23.92 26.93,22.65 26.93,22.01 U1.P$B1 | U1.P$Y2 27.44,17.31 27.31,17.44 26.93,17.44 U1.P$W1 26.93,17.57 26.57,17.57 26.27,17.88 | IC3.3 29.1,10.94 28.53,11.51 28.55,11.62 28.55,11.86 29.19,11.86 | 29.72,12.36 IC3.7 | U1.P$A22 32.52,22.52 32.9,22.9 33.53,22.9 34.04,23.41 C12.1 34.17,23.41 34.17,23.28 34.42,23.03 35.31,23.03 36.05,23.76 38.19,23.76 38.49,23.46 38.69,23.46 v38.99,23.16 | v30.58,14.68 30.58,15.57 U1.P$AD14 | 29.09,14.55 29.09,14.74 C7.1 | v28.07,12.87 28.07,12.36 IC3.10 | v34.88,15.28 34.67,15.48 34.67,15.86 C8.1 | IC3.7 29.69,12.38 29.69,14.14 v29.57,14.27 | v25.02,18.2 25.3,18.48 25.37,18.55 C6.1 25.31,18.49 | v25.91,24.17 25.66,23.92 | IC3.7 29.5,12.19 29.5,12.18
  Bottom 0.09: v29.57,14.27 28.38,13.07 | 34.38,14.78 33.32,14.78 v33.22,14.68 | 40.26,24.79 37.33,24.79
  Bottom 0.127: v7.37,29.38 v6.48,28.49 6.58,28.39 v6.58,27.09 | v29.57,14.27 30.17,14.27 v30.58,14.68 v33.22,14.68 | v28.07,12.87 28.33,13.12 28.38,13.07 29.59,11.85 29.59,11.37 29.21,10.99 28.83,10.99 25.02,14.8 v25.02,18.2 v17.28,25.95 | 34.38,14.78 v34.88,15.28 35.18,15.28 38.99,19.09 v38.99,23.16 39.19,23.16 40.26,24.23 40.26,24.79 | v25.91,24.17 26.01,24.07 36.61,24.07 37.33,24.79
DN  (via drill 0.3)
  Top 0.127: v24.52,28.62 24.52,27.73 J4.A7 | v25.53,28.62 25.53,27.73 J4.B7 | v29.98,33.06 32.64,33.06 D3.1
  Bottom 0.127: v24.52,28.62 v25.53,28.62 25.53,30.4 28.71,33.57 29.47,33.57 v29.98,33.06
DP  (via drill 0.3)
  Top 0.127: J4.B6 24.13,27.6 24.13,26.97 24.26,26.84 24.77,26.84 24.9,26.97 24.9,27.6 J4.A6 25.02,27.73 25.02,28.74 v26.04,29.76 | v27.31,31.03 32.64,31.03 D3.3
  Bottom 0.127: v26.04,29.76 v27.31,31.03
EPD_3V3  (via drill 0.3)
  Top 0.127: C1-EP-DR.1 1.91,8.3 1.91,5.25 3.69,3.47 5.85,3.47 8.77,6.39 L5.2 8.77,6.52 v8.77,9.69 | v14.99,21.12 14.48,21.63 14.1,21.63 EPD_C5.2 | v11.56,19.35 9.02,19.35 8.89,19.22 8.51,19.22 J1.16 8.51,19.09 8.51,18.71 J1.15 8.51,18.58 8.89,18.58 v9.15,18.33 | v22.99,17.06 22.74,16.81 22.1,16.81 Q1.3
  Bottom 0.127: v14.99,21.12 14.99,20.11 14.79,19.91 | 14.79,19.91 14.23,19.35 v11.56,19.35 | v22.99,17.06 22.99,17.57 20.65,19.91 14.79,19.91 | v8.77,9.69 8.77,13 8.64,13.12 8.64,17.82 v9.15,18.33
GDR
  Top 0.127: Q3.1 20.7,12.36 19.69,12.36 R2_EP_DR.2 19.56,12.36 18.16,13.76 13.21,13.76 11.69,12.23 8.51,12.23 J1.2
GND  (via drill 0.1, 0.18, 0.2, 0.3, 0.35)
  Top 0.09: 24.52,24.55 24.52,25.16 24.54,25.19 | 39.35,24.07 40.24,24.07 | 11.94,29 11.53,28.59 9.12,28.59 | C20.2 25.61,17.89
  Top 0.127: 22.61,6.9 22.61,5.76 R_TYPE_SEL.1 22.48,5.63 22.1,5.25 22.1,5 22.36,4.74 23.88,4.74 27.69,8.55 | 22.61,6.9 22.99,7.28 SJ1.1 22.61,6.9 | 22.61,6.9 22.23,7.28 20.96,7.28 D4.1 20.83,7.28 18.67,7.28 14.99,3.6 13.57,3.6 SW_UP.1 13.07,3.97 12.7,4.49 10.29,4.49 9.02,3.22 3.56,3.22 1.53,5.25 1.53,8.68 1.78,8.93 2.04,8.93 2.29,8.68 2.29,8.42 C1-EP-DR.2 | SW_ENT.1 25.69,3.51 26.67,4.49 27.94,4.49 C30.1 28.07,4.49 28.96,4.49 C31.1 29.09,4.61 29.34,4.61 29.59,4.87 29.98,4.87 C29.1 30.1,4.87 31.5,4.87 | 35.06,4.23 34.42,4.87 31.5,4.87 | 35.06,4.23 35.31,3.98 35.31,3.3 SW_DN.1 35.55,3.39 36.05,3.39 36.05,4.14 35.05,4.14 35.05,2.64 | 35.06,4.23 37.09,6.27 37.09,7.66 38.1,8.68 38.1,8.93 J2.3 38.23,9.06 39.37,9.06 J2.5 40.15,7.79 43.12,7.79 43.12,9.32 45.56,11.76 | EPD_C11.1 13.47,14.39 13.47,15.28 EPD_C10.1 | J1.8 8.51,15.28 13.34,15.28 EPD_C10.1 | EPD_C1.1 13.72,22.9 13.72,23.92 EPD_C2.1 13.72,24.05 11.18,24.05 J1.MP2 11.05,23.92 8.39,23.92 7.88,23.41 7.88,19.85 8,19.73 8.39,19.73 J1.17 8.51,19.73 11.31,19.73 11.43,19.85 13.34,19.85 13.47,19.73 EPD_C7.1 13.59,19.6 13.59,19.22 | 13.59,21.12 13.59,21.63 EPD_C5.1 | 13.59,21.12 13.59,20.74 EPD_C6.1 | 13.59,19.22 13.59,18.71 EPD_C8.1 13.59,18.58 13.59,17.7 EPD_C9.1 13.47,17.57 13.47,17.19 | 13.59,21.12 14.36,21.12 14.99,20.49 14.99,19.98 14.23,19.22 13.59,19.22 | 13.47,17.19 13.47,15.41 EPD_C10.1 | J1.MP1 11.05,10.96 13.34,13.25 EPD_C12.1 13.47,13.25 13.47,13.12 13.85,12.74 15.75,12.74 16.39,13.38 18.04,13.38 19.44,11.98 20.07,11.98 20.2,11.85 21.47,11.85 21.59,11.98 21.59,12.87 | 18.8,17.95 18.67,18.08 U3.9
  Top 0.127: 18.8,17.95 19.31,17.44 19.31,17.06 U3.4 | 18.8,17.95 18.8,18.96 U3.6 18.75,19.12 18.75,19.89 18.15,20.49 v18.05,20.49 | 18.8,17.95 U3.9 | 18.04,15.03 17.91,15.03 17.66,15.28 17.66,16.81 17.78,16.93 U3.1 17.91,17.19 | 18.04,15.03 19.56,13.5 19.56,13 R2_EP_DR.1 19.69,12.87 21.59,12.87 | 18.04,15.03 C27.1 | 21.59,12.87 22.86,12.87 25.4,10.33 25.91,10.33 C19.2 | 17.91,17.06 17.91,17.19 | 17.91,17.19 17.91,17.31 18.55,17.95 U3.9 | 17.91,17.19 13.47,17.19 | 31.5,4.87 31.5,6.01 28.96,8.55 27.69,8.55 | 27.69,8.55 26.5,9.74 26.5,9.77 | 35.31,16.93 35.31,17.32 v35.69,17.32 | 35.31,16.93 35.31,16.3 C8.2 | 35.31,16.93 C10.2 35.31,17.06 35.31,18.08 C3.2 | IC3.8 29.09,12.36 28.71,12.36 IC3.9 28.58,12.36 28.58,14.77 28.33,15.03 | R3.2 31.63,12.87 29.98,14.51 C7.2 29.61,15.01 29.21,15.41 28.71,15.41 28.33,15.03 | 28.33,15.03 28.07,15.03 C21.2 27.94,15.03 v27.94,15.54 | v26.57,16.81 26.52,16.87 C20.2 | 24.54,25.19 25.15,25.19 25.53,24.81 C14.2 | 20.2,20.36 20.2,20.11 21.09,19.22 25.76,19.22 25.78,19.19 C6.2 26.15,18.41 v26.15,18.19 | 20.2,20.36 C18.1 20.2,20.49 20.2,21.38 C17.1 | 40.14,21 40.14,20.87 C1.2 40.14,20.74 40.14,20.62 39.75,20.23 35.82,20.23 | 40.14,21 39.63,21.5 38.23,21.5 X1.2 38.1,21.5 36.96,22.65 36.71,22.65 X1.4 | 40.14,21 41.02,21.89 41.02,22.52 40.77,22.77 40.39,22.77 40.14,22.52 40.14,22.27 C2.1 | 32.9,23.66 32.64,23.92 32.26,23.92 31.88,23.54 31.37,23.54 C15.2 31.25,23.54 31.25,23.66 30.99,23.92 29.85,23.92 28.58,22.65 28.58,22.14 28.71,22.01 | 32.9,23.66 32.9,23.41 C13.2 | 32.9,23.66 33.15,23.92 34.42,23.92 34.55,23.79 34.55,23.54 C12.2 | 34.93,20.23 34.93,21.12 C11.2 34.8,21.25 34.8,21.38 34.55,21.63 32.64,21.63 32.13,21.12
  Top 0.127: 34.93,20.23 34.93,20.11 C9.2 | U1.P$F23 32.9,20.74 32.39,20.74 32.13,21 U1.P$74 | 28.71,22.01 28.71,21.38 28.45,21.12 | 28.45,18.58 28.45,17.57 U1.P$87 | 28.45,18.58 U1.P$83 | 28.45,18.58 U1.P$74 | 29.09,20.49 28.45,19.85 U1.P$79 | U1.P$88 29.59,17.57 29.59,18.58 U1.P$74 | U1.P$84 29.72,18.71 U1.P$74 | U1.P$80 29.59,19.85 U1.P$74 | U1.P$89 30.86,17.57 30.86,18.58 U1.P$74 | U1.P$85 30.74,18.71 U1.P$74 | U1.P$81 30.86,19.85 U1.P$74 | 32.01,18.58 32.01,17.57 U1.P$90 | 32.01,18.58 U1.P$86 | 32.01,18.58 U1.P$74 | 31.5,20.36 U1.P$82 | 28.45,21.12 U1.P$75 | 28.45,21.12 U1.P$74 | 29.09,20.49 29.59,21 U1.P$76 | 29.09,20.49 U1.P$74 | 31.5,20.36 30.86,21 U1.P$77 | 31.5,20.36 U1.P$74 | 32.13,21.12 U1.P$78 | 32.13,21.12 U1.P$74 | 28.71,22.01 U1.P$B7 | 34.93,20.23 35.82,20.23 | 26.62,21.89 25.44,23.07 C5.2 25.4,23.41 25.4,23.66 24.52,24.55 22.86,24.55 20.83,22.52 C16.2 20.7,22.39 20.7,22.01 20.62,21.92 20.62,21.76 C17.1 | 35.82,20.23 v35.82,20.11 | 40.01,16.43 C4.2 39.88,16.43 39.88,18.08 C22.2 39.92,18.14 39.92,19.39 42.42,21.89 | 43.69,21.12 TP_BAT_GND.TP | C42.2 35.44,28.36 35.44,27.22 C43.2 | C43.2 36.17,26.56 37.16,25.57 37.98,25.57 C32.1 38.05,25.52 | 44.2,27.6 44.07,27.47 44.07,27.35 C34.1 | 44.2,27.6 44.58,27.6 44.71,27.47 44.71,27.09 43.56,25.95 | 43.56,25.95 43.1,25.49 39.25,25.49 | 39.25,25.49 38.74,25.49 38.74,26.84 39.12,27.22 v40.26,27.22 40.64,27.22 IC2.B1 | v42.3,27.22 41.79,27.22 IC2.B3 | 40.24,24.07 42.42,21.89 | 42.42,21.89 43.06,21.25 43.69,21.25 TP_BAT_GND.TP | 39.25,25.49 39.25,25.39 39.35,25.39 39.35,24.07 | C39.2 10.8,32.43 10.8,33.7 C38.1 10.8,33.82 10.8,33.95 10.93,34.08 11.43,34.08 12.2,33.32 12.2,32.68
  Top 0.127: 12.2,32.68 12.2,32.43 C37.1 | 12.2,32.68 13.21,32.68 14.74,31.16 | 15.12,30.78 15.37,30.52 TP_GND.TP | 15.12,30.78 14.74,31.16 | 8.93,29.49 C25.2 9.01,29.32 | C23.1 4.45,32.94 4.45,31.92 C24.1 4.58,31.79 4.58,30.27 3.69,29.38 3.69,28.87 4.7,27.86 6.48,27.86 7.12,28.49 | 5.18,29 5.08,29 5.08,29.37 IC9.B1 4.95,29.39 v4.75,29.59 | 5.18,29 5.56,29 | 5.18,29 IC9.C1 | 5.56,29 IC9.C3 | 5.56,29 IC9.C2 | C33.2 8.91,28.39 9.01,29.32 | 11.94,29 IC1.D2 11.94,29.12 12.7,29.12 14.74,31.16 | IC9.C3 | 7.12,28.49 7.5,28.11 7.5,27.98 7.72,27.76 8.39,27.76 C33.2 | 7.12,28.49 6.61,29 IC9.C3 | 9.12,28.59 8.92,28.39 C33.2 | 14.74,31.16 TP_GND.TP | 21.21,27.35 21.47,27.6 J4.A12_B1 | 21.21,27.35 20.3,26.43 R1_USB.1 | 21.21,27.35 20.32,28.24 J4.SH4 20.45,28.36 20.45,32.3 J4.SH2 | J4.A1_B12 28.07,27.73 28.58,28.24 28.96,28.24 J4.SH3 29.09,28.24 29.72,27.6 29.72,26.46 R2_USB.2 29.85,26.46 34.8,26.46 35.31,26.97 35.31,27.09 C43.2 | J4.SH2 20.45,32.43 28.96,32.43 J4.SH1 29.09,32.3 29.21,32.17 32.64,32.17 D3.2 32.77,32.17 33.15,32.17 34.67,33.7 41.53,33.7 44.2,31.03 44.2,27.6 | 15.12,30.78 16.77,32.43 16.77,33.32 17.66,34.2 18.55,34.2 20.32,32.43 J4.SH2 | 15.12,30.78 TP_GND.TP | 45.6,11.79 45.56,11.76 | 43.56,25.95 45.22,24.3 | R9.1 9.3,29.02 9.01,29.32 | v19.45,20.39 20.17,20.39 20.2,20.36 | 42.42,21.89 | TP_BAT_GND.TP 43.17,21.27 43.17,16.14 43.55,15.77 44.3,15.77 45.55,14.52 45.55,11.77 45.56,11.76 | 25.61,17.89 25.35,17.89 | C17.1 20.78,20.89 20.85,20.89 | 30.45,11.39 v30.35,11.29 | IC9.C3
  Bottom 0.09: v35.69,17.32 35.59,17.23 29.63,17.23
  Bottom 0.127: v26.57,16.81 26.57,16.91 26.87,17.21 27.27,17.21 27.74,16.74 27.74,15.74 v27.94,15.54 29.63,17.23 | U1.P$75 28.33,21.12 27.34,21.12 26.62,21.85 26.62,21.89 20.44,28.08 J4.SH4 | v35.69,17.32 35.69,19.98 v35.82,20.11 | v40.26,27.22 v42.3,27.22 | J4.SH3 29.09,28.36 29.09,32.3 J4.SH1 | v19.45,20.39 19.35,20.49 v18.05,20.49
  other vias: 18.35,26.19 32.85,16.49 23.85,21.19 20.45,18.79 12.55,23.19 10.55,23.09 45.25,19.89 41.05,18.99 41.05,16.39 45.35,15.59 45.45,14.19 45.35,11.89 44.35,12.79 44.95,9.39 43.45,3.69 34.65,10.19 40.55,7.29 36.95,8.19 40.65,12.99 41.65,11.69 27.65,13.59 31.65,13.89 30.65,24.89 33.75,24.89 37.05,18.19 35.85,24.79 29.85,23.49 30.25,28.89 21.25,30.39 21.35,20.99 16.35,22.59 37.25,6.19 38.75,9.69 37.35,9.69 12.05,26.59 3.65,29.89 5.85,30.89 16.25,21.79 14.95,22.39 13.45,9.29 27.25,5.59 34.05,16.99 28.75,16.49 6.45,25.89 22.85,13.39 32.75,9.39 14.75,25.99 13.95,28.89 10.85,25.09 10.65,28.69 25.55,12.59 29.55,7.59 31.55,10.19 19.65,13.99 16.35,15.19 20.05,15.39
  pour Top: 316 corners
  pour Bottom: 252 corners
IMU_INT1  (via drill 0.18, 0.2)
  Top 0.127: v26.52,18.56 26.65,18.56 26.96,18.9 U1.P$N1 | v29.09,11.5 29.24,11.34 29.59,11.34 IC3.5
  Bottom 0.127: v26.52,18.56 26.52,17.29 26.17,16.93 26.17,14.14 28.81,11.5 v29.09,11.5
IMU_INT2  (via drill 0.2, 0.35)
  Top 0.07: 27.25,16.99 27.65,16.99 27.65,17.89 27.55,17.99 | 27.25,17.99 27.25,18.54 U1.P$P2
  Top 0.09: 27.55,17.99 27.25,17.99
  Top 0.127: IC3.6 29.66,11.79 30.35,11.79 30.35,13.39 v30.15,13.39 | v29.25,13.29 28.95,13.59 v28.95,14.19 | v27.05,16.79 27.25,16.99
  Bottom 0.127: v30.15,13.39 29.35,13.39 v29.25,13.29 | v28.95,14.19 27.65,14.19 26.95,14.89 26.95,16.69 v27.05,16.79
LX1
  Top 0.127: 5.95,29.38 5.56,29.38 IC9.B2 | 5.95,29.38 5.97,29.38 6.73,30.14 6.73,31.92 6.1,32.55 L7.1 | 5.95,29.38 IC9.B3
N$1
  Top 0.127: IC1.D1 11.24,29.23 10.42,29.23 10.07,29.58 R9.2
N$2
  Top 0.09: U1.P$B3 27.79,22.08 27.79,22.37 26.97,23.18
  Top 0.127: 26.97,23.18 26.97,23.91 L2.1
N$3
  Top 0.127: IC3.1 28.2,10.71 28.2,10.33 29.21,9.31 29.47,9.31 31.63,11.47 R3.1
N$4
  Top 0.127: L3.1 27.05,25.19 27.05,24.68 27.56,24.17 L2.2
N$5  (via drill 0.2, 0.3)
  Top 0.127: 28.2,22.62 28.2,25.06 28.07,25.19 L3.2 | 28.2,22.62 28.2,22.01 U1.P$B5 | v33.91,20.62 33.53,21 U1.P$E24 | v33.91,17.7 34.67,16.93 C10.1 | v24.13,25.12 22.69,25.12 20.32,22.75 20.32,22.52 C16.1 | v30.36,23.03 30.74,23.41 C15.1 | v28.07,22.62 28.2,22.62
  Bottom 0.09: 24.13,24.91 27.19,21.86 28.07,21.86
  Bottom 0.127: v33.91,17.7 33.91,18.84 | 33.91,18.84 v33.91,20.62 | 24.13,24.91 v24.13,25.12 | 30.36,21.86 33.69,21.86 35.06,20.49 35.06,19.22 34.67,18.84 33.91,18.84 | 30.36,21.86 30.36,21.76 28.07,21.76 28.07,21.86 v28.07,22.62 | 30.36,21.86 v30.36,23.03
N$6
  Top 0.127: U1.P$A18 31.5,22.52 32.39,23.41 C13.1
N$7
  Top 0.09: 24.86,23.22 26.57,21.5
  Top 0.127: 26.57,21.5 26.93,21.5 U1.P$C1 | 24.86,23.22 C5.1
N$8
  Top 0.127: R2.1 8.22,30.43 7.24,31.41 7.24,33.44 6.73,33.95 5.34,33.95 5.21,33.82 5.21,30.52 3.94,29.25 3.94,29 4.7,28.24 5.06,28.24 IC9.E1
N$9
  Top 0.127: U1.P$D2 27.44,21.25 27.18,21.25 27.05,21.12 25.4,21.12 25.15,21.38 X2.2 25.02,21.5 24.01,22.52 21.85,22.52 20.83,21.5 C17.2
N$10
  Top 0.127: 5.95,28.62 IC9.D3 IC9.D2
N$11  (via drill 0.3, 0.35)
  Top 0.127: v4.45,29.12 4.92,28.66 IC9.D1 | v8.54,30.98 8.83,31.27 R4.1
  Bottom 0.09: 4.45,29.89 v4.45,29.12
  Bottom 0.127: 4.45,29.89 3.56,30.78 3.56,31.03 3.94,31.41 6.71,31.41 7.14,30.98 v8.54,30.98
N$12
  Top 0.127: U1.P$F2 27.44,20.74 27.18,20.74 27.05,20.87 26.29,20.87 25.66,20.23 23.75,20.23 X2.1 22.48,21.38 21.59,20.49 20.7,20.49 C18.2
N$13
  Top 0.127: U1.P$AC5 28.18,16.32 26.83,16.32 26.8,16.3 26.55,16.3 25.5,17.34 C20.1
N$14
  Top 0.127: U1.P$N24 33.53,18.96 34.29,19.73 34.29,19.98 C9.1
N$15  (via drill 0.3)
  Top 0.127: v33.02,19.73 33.02,20.23 U1.P$H23 | C3.1 34.67,18.2 34.55,18.33 v34.55,19.35 36.81,19.35 L1.1
  Bottom 0.127: v33.02,19.73 33.02,20.36 33.79,21.12 34.04,21.12 34.55,20.62 v34.55,19.35
N$16  (via drill 0.3)
  Top 0.127: L1.2 38.36,19.62 39.37,18.61 39.37,18.58 39.37,18.2 C22.1 39.5,18.08 39.5,16.43 C4.1 39.55,16.39 39.55,15.89 v39.8,15.64 | 41.91,17.82 ANT1.1 | 42.05,17.64 ANT1.1 | v41.05,17.39 41.55,17.39 ANT1.1
  Bottom 0.127: 35.05,5.39 39.3,5.39 43.05,9.14 43.05,15.39 | 43.05,15.39 43.05,15.64 v39.8,15.64 | 43.05,15.39 v41.05,17.39
N$17
  Top 0.127: C11.1 34.17,21.38 33.41,21.38 33.28,21.25 33.02,21.25 U1.P$D23
N$18
  Top 0.127: U1.P$B24 33.53,22.01 36.2,22.01 36.58,21.63 X1.1 36.71,21.5 37.34,20.87 39.63,20.87 C1.1
N$19
  Top 0.127: U1.P$A23 33.02,22.52 35.18,22.52 36.07,23.41 37.47,23.41 38.1,22.77 X1.3 38.23,22.77 39.25,21.76 40.26,21.76 40.52,22.01 40.52,22.14 C2.2
N$20
  Top 0.127: D4.2 17.4,7.28 15.88,7.28 C2-EP-DR.1 15.75,7.41 14.48,8.68 14.48,10.96 D2.1
N$21  (via drill 0.3)
  Top 0.127: v21.97,11.6 22.86,11.6 Q3.3 | v16.51,6.77 15.88,6.77 C2-EP-DR.2 15.75,6.9 13.97,6.9 D5.2 13.85,7.03 10.67,10.2 8,10.2 4.32,6.52 L5.1
  Bottom 0.127: v21.97,11.6 21.34,11.6 v16.51,6.77
N$24
  Top 0.127: R1_EP_DR.1 19.44,11.6 21.34,11.6 24.52,8.42 24.52,7.41 SJ1.2 24.52,7.28 24.52,7.03 22.61,5.12 R_TYPE_SEL.2
N$25
  Top 0.127: C32.2 38.36,25.57 38.36,26.84 39.63,28.11 40.9,28.11 41.28,27.73 IC2.A2
N$26
  Top 0.127: R1_USB.2 20.96,26.46 25.4,26.46 25.91,26.97 25.91,27.6 J4.A5
N$27  (via drill 0.3)
  Top 0.127: v26.04,26.46 29.09,26.46 R2_USB.1 | v23.88,28.62 23.37,28.62 23.12,28.36 23.12,27.73 J4.B5
  Bottom 0.127: v23.88,28.62 v26.04,26.46
N$28
  Top 0.127: EPD_C2.2 14.23,24.05 14.23,24.17 13.97,24.43 10.04,24.43 9.78,24.17 8.26,24.17 7.62,23.54 7.62,13.63 8,13.25 8.39,13.25 J1.4
N$29  (via drill 0.3)
  Top 0.127: v16.26,23.28 15.75,23.28 15.37,22.9 14.23,22.9 EPD_C1.2 | v22.86,18.71 21.47,18.71 v20.32,17.57 | v9.15,13.25 8.77,13.63 8.51,13.63 J1.5
  Bottom 0.127: v16.26,23.28 18.29,23.28 v22.86,18.71 | v20.32,17.57 17.02,14.27 17.02,12.74 16.64,12.36 10.04,12.36 v9.15,13.25
N$30
  Top 0.127: EPD_C6.2 13.97,20.62 13.97,20.49 13.72,20.23 10.55,20.23 10.42,20.11 8.51,20.11 J1.18
N$31  (via drill 0.3)
  Top 0.127: v14.48,20.23 14.48,20.11 14.1,19.73 EPD_C7.2 | v10.29,20.62 8.51,20.62 J1.19
  Bottom 0.127: v14.48,20.23 10.67,20.23 v10.29,20.62
N$32  (via drill 0.3)
  Top 0.127: v15.5,20.74 15.5,20.11 14.1,18.71 EPD_C8.2 | v10.16,21.63 9.91,21.63 9.53,21.25 8.51,21.25 J1.20
  Bottom 0.127: v15.5,20.74 15.5,21.25 15.12,21.63 v10.16,21.63
N$33  (via drill 0.3)
  Top 0.127: v13.97,16.68 13.97,15.41 EPD_C10.2 | v9.4,22.14 8.51,22.14 J1.22
  Bottom 0.127: v13.97,16.68 13.59,16.68 9.4,20.87 v9.4,22.14
N$34  (via drill 0.3)
  Top 0.127: v14.48,13.25 14.1,13.25 EPD_C12.2 | v7.75,24.68 8.26,25.19 v9.15,25.19 | v9.4,23.41 8.64,23.41 8.51,23.28 J1.24
  Bottom 0.127: v14.48,13.25 14.48,14.52 7.75,21.25 v7.75,24.68 | v9.15,25.19 9.15,23.66 v9.4,23.41
OUT+
  Top 0.127: IC2.A3 41.79,27.73 41.79,31.28 TP_OP.TP
OUT-
  Top 0.127: IC2.C3 41.79,26.71 42.42,26.71 43.06,27.35 43.06,31.79 42.3,32.55 39.88,32.55 TP_ON.TP
P0.13/1.5D  (via drill 0.3)
  Top 0.127: R5.1 28.2,6.14 27.82,5.76 27.82,5.38 27.94,5.25 27.94,5 C30.2 27.94,4.87 v26.29,4.87 | v11.31,2.61 SW_UP.2
  Bottom 0.127: v26.29,4.87 13.57,4.87 v11.31,2.61
P0.14/1.5D  (via drill 0.3)
  Top 0.127: v28.58,5 28.96,5 C31.2 | R8.1 v28.58,6.65 27.44,6.65 25.28,4.49 23.37,4.49 22.99,4.11 22.99,3.3 SW_ENT.2
  Bottom 0.127: v28.58,6.65 v28.58,5
P1.01/1.6C
  Top 0.127: R_PWR_EPD.1 21.34,16.43 21.34,16.3 21.85,15.79 24.13,15.79 Q1.1
P1.02/1.6C  (via drill 0.3)
  Top 0.127: 30.61,4.49 31.63,4.49 32.53,3.58 SW_DN.2 | 30.61,4.49 30.1,4.49 C29.2 | v30.36,6.14 29.85,6.14 R7.1 | 30.61,4.49 v30.61,4.36
  Bottom 0.127: v30.36,6.14 30.36,4.61 v30.61,4.36
PMIC_INT  (via drill 0.18, 0.2, 0.35)
  Top 0.07: U1.P$T2 27.66,18.45 27.66,21.69 27.35,21.69 v27.35,22.29
  Top 0.09: v26.05,25.29 25.85,25.49 18.75,25.49
  Top 0.127: 18.75,25.49 18.75,24.19 v18.35,24.19 | v17.25,24.89 12.45,24.89 v12.45,27.09 | v12.45,28.29 12.35,28.19 v10.95,28.19 | v11.15,30.89 11.5,30.89 IC1.A1 | v28.85,23.59 v28.85,24.59
  Bottom 0.127: v27.35,22.29 27.35,23.59 v28.85,23.59 | v18.35,24.19 17.25,24.19 v17.25,24.89 | v12.45,27.09 v12.45,28.29 | v10.95,28.19 11.15,28.19 v11.15,30.89 | v28.85,24.59 26.15,24.59 26.15,25.29 v26.05,25.29
PREVGH
  Top 0.127: EPD_C9.2 14.1,17.7 14.1,17.95 16.01,19.85 16.01,20.87 14.74,22.14 10.04,22.14 9.53,21.63 8.51,21.63 J1.21
PREVGL  (via drill 0.3)
  Top 0.127: v15.12,14.27 13.97,14.27 EPD_C11.2 | v16.51,12.87 16.51,12.36 17.78,11.09 D2.2 | v9.4,22.77 8.51,22.77 J1.23 | v8.39,24.68 v9.66,24.68
  Bottom 0.127: v16.51,12.87 v15.12,14.27 8.39,21 v8.39,24.68 | v9.4,22.77 9.91,23.28 9.91,24.43 v9.66,24.68
RESE
  Top 0.127: Q3.2 20.7,11.09 19.44,11.09 R1_EP_DR.2 19.31,11.09 18.67,10.46 17.28,10.46 16.01,11.73 13.72,11.73 12.45,10.46 8.77,10.46 7.88,11.34 7.88,12.49 8,12.62 8.39,12.62 J1.3
RESET  (via drill 0.1, 0.3, 0.35)
  Top 0.09: U1.P$AC13 30.21,15.39 v30.05,15.39
  Top 0.127: 44.2,15.41 39.5,10.71 39.5,10.33 J2.6 | v39.75,24.48 40.21,24.48 40.52,24.17 v41.02,24.68 | v19.05,26.59 19.05,27.09 18.42,27.73 TP_RESET.TP 18.29,27.86 18.29,28.24 v17.4,29.12 | 39.73,10.41 39.62,10.5 J2.6 | v39.15,15.09 39.05,15.09 v38.55,15.59 | v38.55,17.19 38.25,17.49 v36.35,17.49 | v39.95,9.69 39.6,9.69 39.3,9.6 39.3,10.19 J2.6
  Bottom 0.127: v39.75,24.48 39.55,24.48 37.01,21.93 | 37.01,21.93 36.78,21.71 | 24.43,21.81 19.65,26.59 v19.05,26.59 | v30.05,15.39 30.25,15.19 34.15,15.19 36.35,17.39 v36.35,17.49 36.55,17.64 36.55,21.89 37.05,21.89 37.01,21.93 | v39.15,15.09 42.15,15.09 42.15,9.59 40.09,9.79 v39.95,9.69 | v38.55,17.19 v38.55,15.59 | v17.4,29.12 17.4,32.43 16.13,33.7 16.13,33.95 16.51,34.33 35.82,34.33 42.8,27.35 42.8,27.09 41.02,25.31 v41.02,24.68
SCL/1.4C  (via drill 0.3)
  Top 0.09: v16.77,23.79 16.67,23.69 16.67,21.1
  Top 0.127: v39.25,26.71 40.64,26.71 IC2.C1 | 16.67,21.1 18.29,19.47 18.29,18.96 U3.7
  Bottom 0.127: v39.25,26.71 26.93,26.71 26.17,25.95 25.66,25.95 21.97,29.63 20.2,29.63 16.77,26.2 v16.77,23.79
SCL/2.4C  (via drill 0.1, 0.3, 0.35)
  Top 0.09: U1.P$M2 26.61,19.25
  Top 0.127: v7.09,27.73 6.73,27.73 6.61,27.6 3.56,27.6 2.42,28.74 TP_SCL.TP | IC1.B1 11.43,29.89 11.35,29.89 v10.73,30.51 10.73,30.59 R4.2 | v1.66,30.52 1.91,30.78 2.16,30.78 R17.2 | IC3.12 28.07,11.34 27.52,11.34 v24.16,14.7 24.65,15.19 25.65,15.19 v25.65,15.49 | v26.35,18.99 26.61,19.25
  Bottom 0.127: v10.73,30.51 10.73,29.43 9.66,28.36 | 9.66,28.36 9.02,27.73 v7.09,27.73 7.19,27.63 7.19,27.07 6.71,26.59 5.34,26.59 1.66,30.27 v1.66,30.52 | v24.16,14.7 24.16,16.78 18.67,22.27 15.75,22.27 9.66,28.36 | v25.65,15.49 25.65,18.29 v26.35,18.99
SDA/1.4C  (via drill 0.1, 0.2, 0.25, 0.3, 0.35)
  Top 0.07: 40.95,25.99 40.95,26.9 IC2.B2
  Top 0.09: 17.38,23.82 17.38,21.22
  Top 0.127: U3.8 16.45,18.96 v16.45,20.29 | v19.25,20.99 19.25,25.09 v21.85,25.09 | v38.85,25.09 38.35,24.59 v38.55,24.39 | v39.75,25.99 40.95,25.99 | v37.85,32.94 v37.85,26.2 | v16.26,24.43 16.77,24.43 17.38,23.82 | v17.28,21.12 17.38,21.22
  Bottom 0.09: v19.25,20.99 19.15,20.89 17.28,20.89 16.45,20.89
  Bottom 0.127: v16.45,20.29 16.45,20.89 | v21.85,25.09 23.05,25.09 23.05,23.89 24.25,23.89 24.25,22.69 25.05,22.69 25.05,20.49 32.45,20.49 32.66,20.7 32.75,21.09 | 33.25,22.19 34.12,23.06 arc-45 35.4,23.59 37.75,23.59 v38.55,24.39 | v39.75,25.99 v38.85,25.09 38.87,25.19 v37.85,26.2 | v37.85,32.94 37.6,32.94 35.94,34.59 16.39,34.59 15.88,34.08 15.88,24.81 v16.26,24.43 | v17.28,21.12 17.28,20.89 17.28,20.87
SDA/2.4C  (via drill 0.2, 0.3)
  Top 0.127: v4.07,30.9 2.92,30.9 R18.2 | IC1.C1 11.43,29.51 11.22,29.51 10.69,30.03 v10.29,30.03 9.89,30.43 R2.2 | v5.47,27.19 4.98,26.71 2.54,26.71 TP_SDA.TP | U1.P$L1 26.89,19.57 23.02,19.57 v22.86,19.73 | v29.34,9.82 28.71,10.46 28.71,10.71 IC3.2
  Bottom 0.127: v10.29,30.03 10.14,29.89 6.48,29.89 6.35,29.76 5.47,29.76 | 5.47,29.76 5.21,29.76 v4.07,30.9 | 5.47,29.76 5.47,28.62 | 5.47,28.62 v5.47,27.19 | v22.86,19.73 22.86,19.35 24.77,17.44 24.77,14.39 26.8,12.36 | v29.34,9.82 26.8,12.36 | 5.47,28.62 4.19,28.62 1.78,31.03 1.53,31.03 1.15,30.65 1.15,30.4 6.35,25.19 8.51,25.19 8.89,24.81 8.89,21 13.72,16.17 18.29,16.17 20.2,18.08 20.45,18.08 21.72,16.81 21.72,12.74 24.26,10.2 24.64,10.2 26.8,12.36
SWDCLK
  Top 0.127: 36.3,13.76 37.22,12.84 37.22,11.22 38.1,10.33 J2.4 | U1.P$AA24 33.53,16.93 34.17,16.3 34.17,15.16 35.56,13.76 36.3,13.76 | TP_SWDCLK.TP 18.29,30.14 18.29,29.63 19.56,28.36 19.56,26.46 20.2,25.82 36.53,25.82 38.63,23.72 40.21,23.72 41.28,22.65 41.28,21.12 40.14,19.98 37.6,19.98 37.34,19.73 37.34,18.96 37.47,18.84 37.6,18.84 39.12,17.31 39.12,17.06 39.07,17.04 36.3,13.76
SWDIO  (via drill 0.3)
  Top 0.127: U1.P$AC24 33.5,16.46 33.5,15.44 34.04,14.9 v34.04,14.35 34.04,11.6 35.18,10.46 36.71,10.46 36.83,10.33 J2.2 | v16.64,33.82 15.88,33.06 15.5,33.06 TP_SWDIO.TP
  Bottom 0.127: v16.64,33.82 32.77,33.82 40.52,26.08 40.52,20.23 34.63,14.35 v34.04,14.35
SWO
  Top 0.127: U1.P$AD22 32.52,15.92 32.52,11.98 29.59,9.06 28.45,9.06 21.97,15.54 21.59,15.54 19.72,17.41 19.72,19.48 17.78,21.41 17.78,26.71 16.89,27.6 16.89,31.66 18.04,32.81 TP_SW0.TP
VBAT/1.2A  (via drill 0.3)
  Top 0.127: U3.3 18.8,17.06 18.42,17.06 U3.2 18.29,16.93 18.29,16.55 18.16,16.43 18.16,15.54 C27.2 18.16,15.41 18.29,15.41 v18.55,15.16 | v42.17,23.28 43.06,23.28 43.69,23.92 TP_VBAT.TP
  Bottom 0.127: v18.55,15.16 18.55,9.44 16.01,6.9 16.01,6.65 16.39,6.27 24.13,6.27 27.18,9.31 29.98,9.31 42.17,21.5 v42.17,23.28
VBAT/2.5C
  Top 0.127: IC1.C2 11.94,29.51 12.58,29.51 12.96,29.89 12.96,32.05 12.7,32.3 C37.2
VBUS/1.5D
  Top 0.127: C43.1 34.93,27.22 34.93,28.36 C42.1 34.93,28.49 34.93,30.14 34.29,30.78 | 34.29,30.78 34.29,31.41 34.93,32.05 35.18,32.05 D3.5 | 26.8,29.63 26.93,29.51 26.93,27.86 27.05,27.73 J4.A4_B9 | 26.8,29.63 26.17,30.27 24.52,30.27 22.48,28.24 22.48,27.73 J4.A9_B4 | 34.29,30.78 33.66,30.78 32.52,29.63 26.8,29.63
VBUS/2.6D  (via drill 0.3)
  Top 0.127: C21.1 27.44,15.03 27.44,15.92 U1.P$AD2 27.44,16.04 25.15,16.04 24.77,16.43 v22.99,16.43 | 11.81,30.75 11.81,33.06 11.18,33.7 C38.2 | 11.81,30.75 11.81,30.27 IC1.A2 | v17.33,19.4 17.33,20.05 15.88,21.5 v15.88,22.77 | 11.81,30.75 v12.45,30.75
  Bottom 0.127: v22.99,16.43 22.48,16.93 22.48,17.7 20.78,19.4 v17.33,19.4 | v15.88,22.77 15.88,23.03 12.96,25.95 12.96,30.24 v12.45,30.75
VREG  (via drill 0.3)
  Top 0.127: 4.58,33.32 4.7,33.19 4.7,33.06 C23.2 | 4.58,33.32 4.19,33.32 3.56,32.68 C24.2 | v12.45,30.01 12.32,29.89 11.94,29.89 IC1.B2 | v10.8,31.66 10.42,31.66 9.78,32.3 C39.1 9.66,32.43 9.66,33.06 8.51,34.2 5.21,34.2 4.58,33.57 4.58,33.32 | v11.81,27.35 11.05,26.59 10.8,26.59 TP_VREG.TP | 5.92,29.79 5.95,29.76 IC9.A3 5.94,29.98 v6.23,30.27 6.05,30.39 5.55,29.89 IC9.A2 5.56,29.76 5.53,29.79 IC9.A1
  Bottom 0.09: v10.8,31.66 10.9,31.66 12.45,30.11 v12.45,30.01
  Bottom 0.127: v6.23,30.27 6.33,30.17 9.7,30.17 10.8,31.27 v10.8,31.66 | v11.81,27.35 11.81,29.38 v12.45,30.01